# Altium PCB E73N30.PcbDoc
Units mm, origin at the board's own origin, x right, y up, seen from the top; angles counter-clockwise.
Board outline 30 x 91.75 mm, 2 copper layers (Top Layer, Bottom Layer); 36 components, 41 nets, 174 pads, 0 vias.
Unrouted connection lines stored in the file: 108.
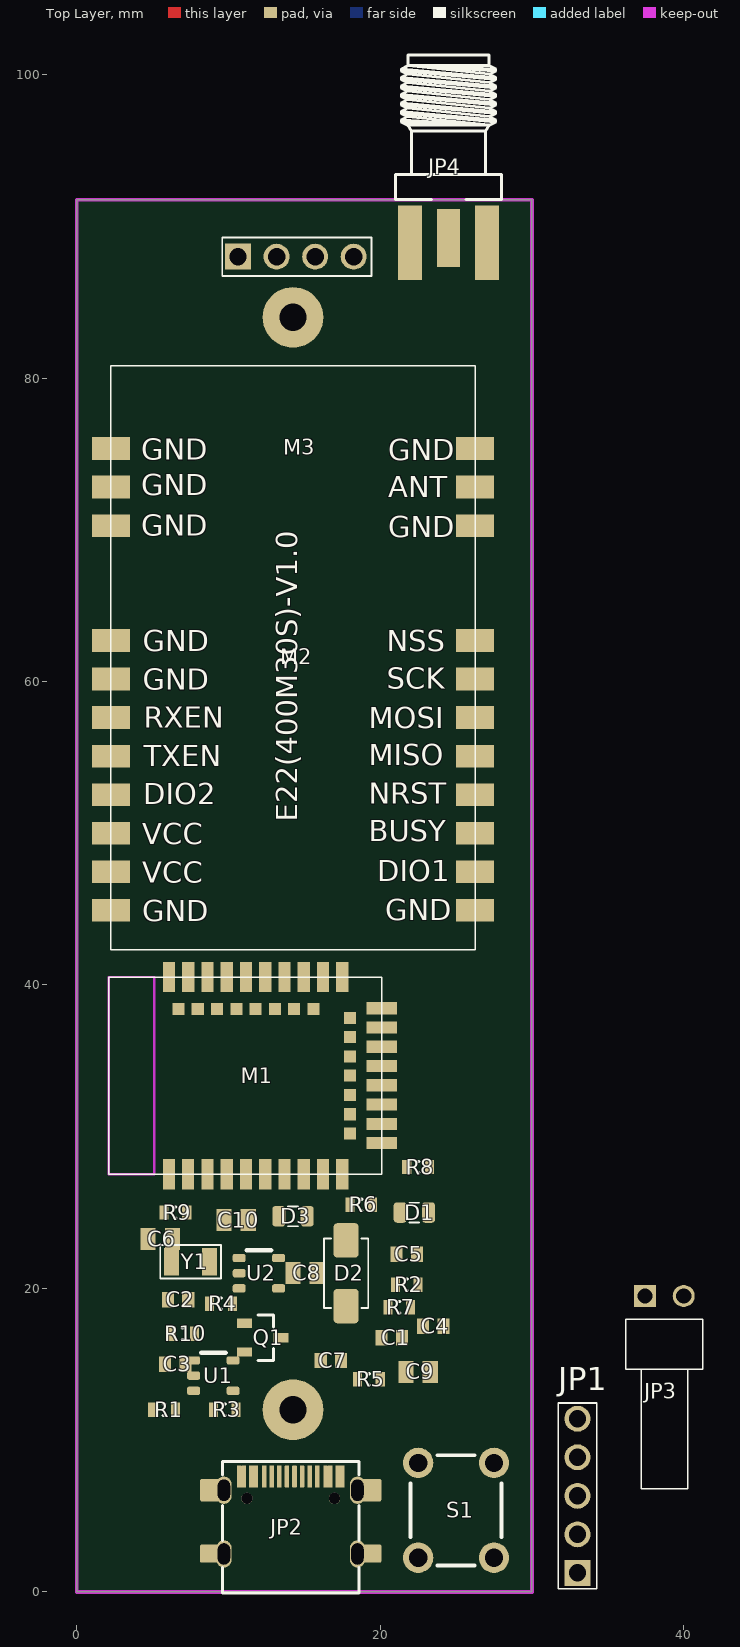
[diagram p0: Top Layer view]
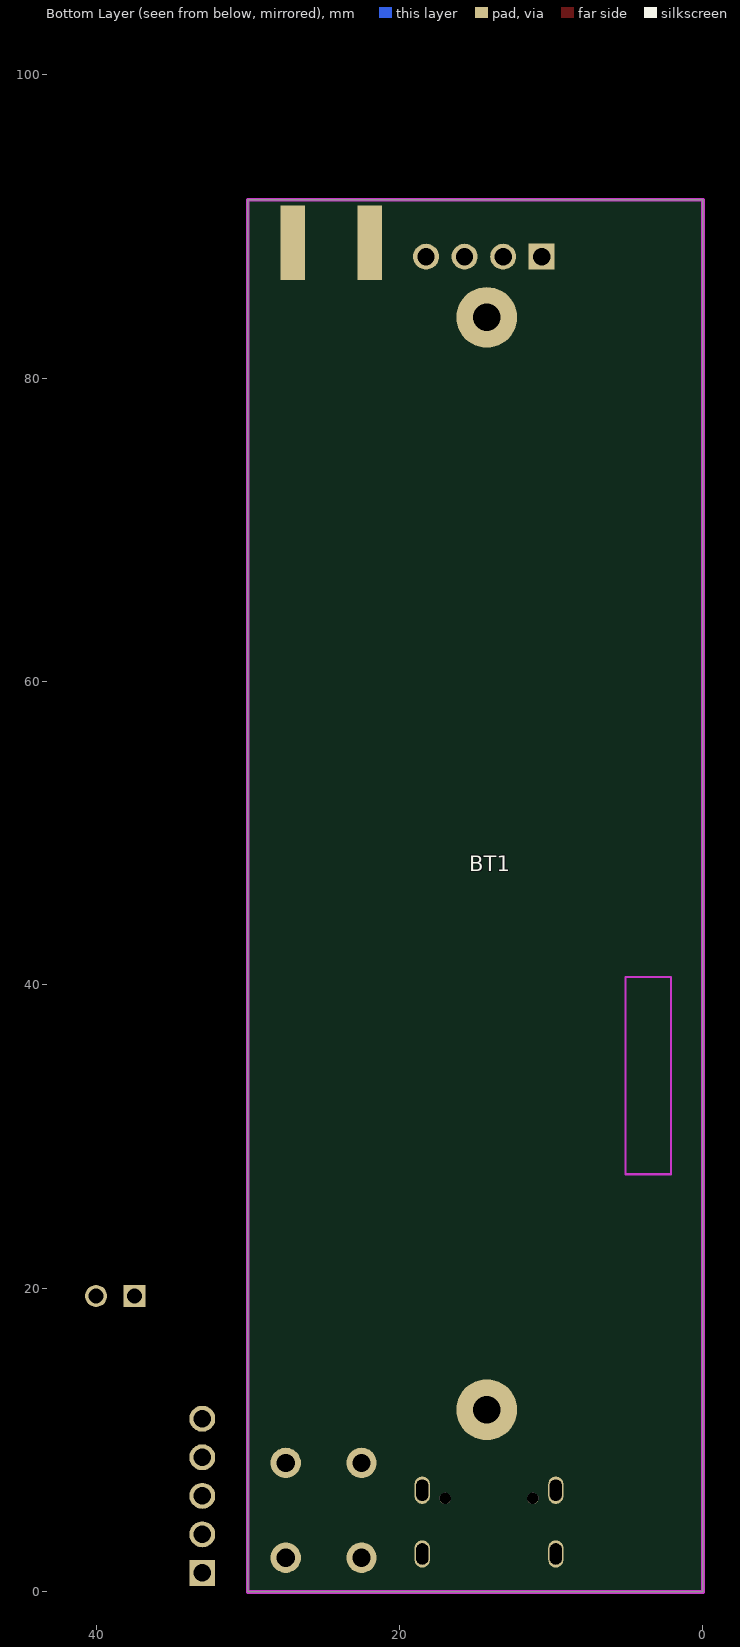
[diagram p1: Bottom Layer view, seen from below]

## Layer stack, top to bottom
Top Solder: solder mask 0.0102, Solder Resist, Dk 3.5
Top Layer: signal copper 0.0356
Dielectric 1: dielectric 0.32, FR-4, Dk 4.8
Bottom Layer: signal copper 0.0356
Bottom Solder: solder mask 0.0102, Solder Resist, Dk 3.5

## Board outline
0,0 0,91.75 30,91.75 30,0

## Design rules (kind name [scope] priority, off if disabled: settings)
Clearance [All] p1: gap=0.254 ignorepadtopadclearanceinfootprint=FALSE
PolygonConnect [All] p1: connectstyle=Relief reliefconductorwidth=0.254 reliefentries=4 polygonreliefangle="90 Angle" airgapwidth=0.254
RoutingVias [All] p1: holewidth=0.711 width=1.27 viastyle="Through Hole" minholewidth=0.711 minwidth=1.27 maxholewidth=0.711 maxwidth=1.27
SolderMaskExpansion [All] p1: expansion=0 istentingtop=FALSE
SupplyNets "Schematic Supply Nets_4" [InNet('VBUS')] p1: voltage=0.000
SupplyNets "Schematic Supply Nets_3" [InNet('V_BATT')] p2: voltage=0.000
SupplyNets "Schematic Supply Nets_2" [InNet('GND')] p3: voltage=0.000
SupplyNets "Schematic Supply Nets_1" [InNet('VIN')] p4: voltage=0.000
SupplyNets "Schematic Supply Nets" [InNet('VCC')] p5: voltage=0.000
Width [All] p1: maxlimit=0.254 minlimit=0.254 preferedwidth=0.254
30 further rules are at their usual default settings.

## Components (designator, comment, footprint, x,y, rotation, side; value= is the part's Value field where it differs from the comment)
BT1 "18650" 18650 14.25,48 r90 bottom
C1 "100nF" C-0603 20.75,16.75 r0 top
C2 "22pF" C-0603 6.675,19.25 r0 top
C3 "22pF" C-0603 6.5,15 r0 top
C4 "CAPN" C-0603 23.5,17.5 r0 top
C5 "CAPN" C-0603 21.75,22.25 r0 top
C6 "10uF" C-0805 5.5,23.25 r0 top
C7 "CAPN" C-0603 16.75,15.25 r0 top
C8 "10uF" C-0805 15.05,21 r0 top
C9 "10uF" C-0805 22.5,14.5 r0 top
C10 "10uF" C-0805 10.5,24.5 r0 top
D1 "DLED" LED0805 22.25,25 r0 top
D2 "SS14" D-SMA 17.75,21 r90 top
D3 "LED_1" LED_0805 14.25,24.75 r0 top
JP1 "HEADER 5" PLS1-5 33,1.25 r90 top
JP2 "L-KLS1-5473" USB_C_SMD_SLOT 14.1,7.6 r0 top
JP3 "CON2" WH-02R 37.46,19.5 r0 top
JP4 "EM-SA071-GGT" SMA_F_EDGE 24.5,90.5 r270 top
M1 "E73-2G4M08S1C" E73-2G4M08S1CX 20.1,40.52 r180 top
M2 "E22-400M30S" PE22(400M30S) 2.25,75.35 r90 top
M3 "OLED0_96" OLED096_I2C 10.63,88 r0 top
Q1 "IRLML6401" SOT-23 12.25,16.75 r0 top
R1 "4k7" R-0603 5.75,12 r0 top
R2 "10k" R-0603 21.75,20.25 r0 top
R3 "4k7" R-0603 9.75,12 r0 top
R4 "4k7" R-0603 9.5,19 r0 top
R5 "1k" R-0603 19.25,14 r0 top
R6 "100k" R-0603 18.75,25.5 r0 top
R7 "100k" R-0603 21.25,18.75 r0 top
R8 "10k" R-0603 22.5,28 r0 top
R9 "10k" R-0603 6.5,25 r0 top
R10 "470" R-0603 7,17 r0 top
S1 "KLS7-TS3602 -3 15-180" KN_MIN 25,5.4 r90 top
U1 "STC4054GR" SOT-23-5 9,14.25 r0 top
U2 "LP5907MFX-3.0" SOT-23-5 12,21 r0 top
Y1 "32.768k" KX-327 7.5,21.75 r0 top

## Footprints (in the part's own frame and the unit in brackets; to place one, negate y for a bottom-side part, rotate by r counter-clockwise, add the part's x,y. Pads: shape width x height; smd on the part's side, far side on the other; paste and mask are expansions set on the pad)
18650 [mm]
  round 4 hole 1.8: 1(-36,0) 2(36,0)
  body extent -37.5,-10.5 37.5,10.5, height 21
C-0603 [mm] "Chip Capacitor, 2-Leads, Body 1,60x0,80mm, IPC Medium Density"
  rect 0.8x1 smd: 1(-0.675,0) 2(0.675,0)
  body extent -0.8,-0.4 0.8,0.4, height 0.8
C-0805 [mm] "Chip Capacitor, 2-Leads, Body 2,00x1,25mm, IPC Medium Density"
  rect 1x1.45 smd: 1(-0.8,0) 2(0.8,0)
  body extent -1,-0.62 1,0.63, height 1.25
D-SMA [mm] "Diode, Molded Body; 4.315 mm L X 2.605 mm W X 2.41 mm H body"
  rrect30% 2.27x1.65 smd: 1(-2.165,0) 2(2.165,0)
  silkscreen extent -2.29,-1.46 2.29,1.46, body extent -2.61,-1.3 2.61,1.3, height 2.41
E73-2G4M08S1CX [mm]
  rect 0.8x2 smd: 1(14.03,13) 2(12.76,13) 3(11.49,13) 4(10.22,13) 5(8.95,13) 6(7.68,13) 7(6.41,13) 8(5.14,13) 9(3.873,13) 10(2.6,13) 26(2.6,0) 27(3.87,0) 29(5.14,0) 31(6.41,0) 33(7.68,0) 35(8.95,0) 37(10.22,0) 39(11.49,0) 41(12.757,0) 43(14.03,0)
  rect 2x0.8 smd: 11(0,10.945) 13(0,9.675) 15(0,8.405) 17(0,7.135) 19(0,5.865) 21(0,4.595) 23(0,3.325) 25(0,2.055)
  rect 0.8x0.8 smd: 12(2.1,10.31) 14(2.1,9.04) 16(2.1,7.77) 18(2.1,6.5) 20(2.1,5.23) 22(2.1,3.96) 24(2.1,2.69) 28(4.505,2.1) 30(5.775,2.1) 32(7.045,2.1) 34(8.315,2.1) 36(9.585,2.1) 38(10.855,2.1) 40(12.125,2.1) 42(13.395,2.1)
  Keep-Out Layer lines w0.15: 18,13 18,0 15,0 15,13 18,13
  silkscreen extent 0,0 18,13, body extent 0,0 18.29,13, height 3
KN_MIN [mm]
  round 2 hole 1.2 mask+0.05: 1(-3.15,-2.5) 1(3.1,-2.5) 2(-3.15,2.5) 2(3.1,2.5)
  silkscreen extent -3.66,-3 3.6,3, body extent -3.95,-3.1 3.95,3.1, height 7.01
KX-327 [mm]
  rect 1x1.8 smd: 1(-1.25,0) 2(1.25,0)
  silkscreen extent -2,-1.1 2,1.1, body extent -1.6,-0.75 1.6,0.75, height 0.71
LED0805 [mm] "LED, Chip; 2.00 mm L X 1.25 mm W X 0.80 mm H body"
  rrect51% 0.86x1.35 smd: 1(-0.935,0) 2(0.935,0)
  silkscreen extent -0.33,-0.65 0.33,0.65, body extent -1,-0.63 1,0.63, height 0.25
LED_0805 [mm] "LED, Chip; 2.00 mm L X 1.25 mm W X 0.80 mm H body"
  rrect51% 0.86x1.35 smd: A(0.935,0) K(-0.935,0)
  silkscreen extent -0.33,-0.65 0.33,0.65, body extent -1,-0.63 1,0.63, height 0.25
OLED096_I2C [mm] "Header, Vertical, 2.54 mm pitch; 0.70 mm lead width, 7 pins, 1 row, 7 pins per row, 16.51 mm L X 2.54 mm W X 7.54 mm H body"
  rect 1.71x1.71 hole 1.14 paste-2539.97: 1(0,0)
  round 1.71 hole 1.14 paste-2539.97: 2(2.54,0) 3(5.08,0) 4(7.62,0)
  silkscreen extent -1.04,-1.27 8.8,1.27, body extent -10.19,-26.7 17.81,1.3, height 7.08
PE22(400M30S) [mm] "38.5mm*24mm*3.8mm-S"
  rect 1.5x2.5 smd: 1(0,0) 2(-2.54,0) 3(-5.08,0) 4(-12.65,0) 5(-15.19,0) 6(-17.73,0) 7(-20.27,0) 8(-22.81,0) 9(-25.35,0) 10(-27.89,0) 11(-30.43,0) 12(-30.43,-24) 13(-27.89,-24) 14(-25.35,-24) 15(-22.81,-24) 16(-20.27,-24) 17(-17.73,-24) 18(-15.19,-24) 19(-12.65,-24) 20(-5.08,-24) 21(-2.54,-24) 22(0,-24)
  silkscreen extent -33.04,-24 5.46,0, body extent -32.81,-24.01 5.69,0.01, height 3.87
PLS1-5 [mm] "Header, Vertical, 2.54 mm pitch; 0.70 mm lead width, 5 pins, 1 row, 5 pins per row, 11.43 mm L X 2.54 mm W X 7.54 mm H body"
  rect 1.71x1.71 hole 1.14 paste-2539.97: 1(0,0)
  round 1.71 hole 1.14 paste-2539.97: 2(2.54,0) 3(5.08,0) 4(7.62,0) 5(10.16,0)
  silkscreen extent -1.04,-1.27 11.2,1.27, body extent -0.64,-1.27 10.8,1.27, height 7.54
R-0603 [mm] "Chip Resistor, 2-Leads, Body 1,60x0,82mm, IPC Medium Density"
  rect 0.6x0.95 smd: 1(-0.75,0) 2(0.75,0)
  silkscreen extent -0.05,-0.38 0.05,0.38, body extent -0.8,-0.4 0.8,0.4, height 0.45
SMA_F_EDGE [mm] "SMA End Launch Jack for 1.58mm PCB, 50 Ohm, Flat Tab Contact"
  rect 3.81x1.5 smd: 1(1.27,0)
  rect 4.9x1.6 smd: 2(1.575,2.54) 2(1.575,-2.54)
  rect 4.9x1.6 smd far side: 2(1.575,2.54) 2(1.575,-2.54)
  silkscreen extent -10.81,-3.5 -1.28,3.5, body extent -10.73,-3.25 2.77,3.25, height 3.7
SOT-23 [mm]
  rect 1x0.6 smd: 1(-1.2,0.95) 2(-1.2,-0.95) 3(1.2,0)
  silkscreen extent -0.3,-1.5 0.7,1.5, body extent -1.25,-1.5 1.25,1.5, height 1.2
SOT-23-5 [mm]
  rrect50% 0.85x0.55 smd mask+0.06: 1(-1.3,1) 2(-1.3,0) 3(-1.3,-1) 4(1.3,-1) 5(1.3,1)
  silkscreen extent -0.8,1.5 0.8,1.5, body extent -1.4,-1.45 1.4,1.45, height 1.45
USB_C_SMD_SLOT [mm] "USB 3.1 Type C"
  rrect20% 1.8x1.2 smd mask+0.07: 1(-5.08,-5.08) 1(5.08,-5.08)
  rrect20% 1.8x1.5 smd mask+0.07: 1(-5.08,-0.9) 1(5.08,-0.9)
  oval 1x1.8 hole 0.8 slot 1.4 at 90 deg: 1(-4.4,-5.1) 1(-4.4,-0.9) 1(4.4,-5.1) 1(4.4,-0.9)
  rrect30% 0.3x1.45 smd paste-2 mask+0.07: A1(-3.1,0) A4(-2.6,0) A9(2.6,0) A12(3.4,0) B1(3.1,0) B4(2.3,0) B9(-2.3,0) B12(-3.4,0)
  rrect30% 0.3x1.45 smd mask+0.07: A5(-1.25,0) A6(-0.25,0) A7(0.25,0) A8(1.25,0) B5(1.75,0) B6(0.75,0) B7(-0.75,0) B8(-1.75,0)
  round 0.75 hole 0.75 unplated paste-2539.97 mask+0.07: MH(-2.885,-1.44) MH(2.885,-1.44)
  silkscreen extent -4.5,-7.69 4.5,1, body extent -4.47,-7.7 4.47,0.2, height 3.2
WH-02R [mm]
  rect 1.45x1.45 hole 1: 1(0,0)
  round 1.45 hole 1: 2(2.54,0)
  silkscreen extent -1.27,-12.7 3.81,-1.52, body extent -1.3,-13.3 3.8,0.27, height 5.9

## Part data
BT1: library part Battery, "Multicell Battery", LatestRevisionDate=17-Jul-2002, LatestRevisionNote="Re-released for DXP Platform.", PackageDescription="Battery; 2 Leads", PackageReference=BAT-2, Published=24-Mar-1999, Publisher="Altium Limited"
C1 C2 C3 C6 C8 C9 C10: library part CAPN, Voltage=50V, Вид=Конденсатор, Точність/група=NP0
C4 C5 C7: Voltage=50V, Вид=Конденсатор, Точність/група=NP0
D2: library part DIODSH, Вид=Діод
JP4: library part SMA, "SMA Female R/A PCB Mount", Вид=Роз'єм
M2: library part E22
M3: library part OLED0_96_I2C
Q1: library part MOSF-P, Вид=Транзистор
R1 R2 R3 R4 R5 R6 R7 R8 R9 R10: library part RES, Вид=Резистор, Точність/група=5%
S1: library part SW-1, Вид=Кнопка
U1: library part STC4054
U2: library part LP5907, "250mA Low-Dropout Regulator", Вид=Мікросхема
Y1: library part Y, Вид=Кварц, Точність/група=20ppm
D1 D3: Вид=Світлодіод
JP1 JP3: Вид=Роз'єм
JP2: Mounting  Method=SMD

## Nets (pads, with @x,y where several pads share a name; then routed paths per layer and width w, separated by ;. In a path a pad name is that pad's centre, name@x,y a point inside that pad or via, vN(x,y) a via of type N, cw(c..) or ccw(c..) an arc to the next point about the centre after c; other vN are vias at no path point)
ANT_SW: M1.30 M2.6
BATT_LEVEL: C7.1 M1.9 R7.1 R8.2
BUSY: M1.8 M2.14
DN: JP2.A7 JP2.B7 M1.29
DP: JP2.A6 JP2.B6 M1.31
ENC_A: M1.42
ENC_B: M1.40
ENC_PUSH: M1.38
GND: BT1.2 C1.1 C2.1 C3.1 C4.2 C5.2 C6.2 C7.2 C8.2 C9.2 C10.2 D3.K JP1.5 JP2.A1 JP2.A12 JP2.B1 JP2.B12 JP3.2 JP4.2 M1.5 M1.21 M1.24 M2.1 M2.2 M2.3 M2.4 M2.5 M2.11 M2.12 M2.20 M2.22 M3.1 R1.1 R3.1 R4.1 R6.1 R8.1 S1.1 U1.2 U2.2
GPS_EN: M1.35
GPS_RX: M1.34
GPS_TX: M1.32
KEY: M1.36 R9.2 S1.2
LED: M1.28 R10.2
MISO: M1.7 M2.16
MOSI: M1.2 M2.17
NetC2_2: C2.2 M1.11 Y1.2
NetC3_2: C3.2 M1.13 Y1.1
NetD1_2: D1.2 R5.2
NetD3_A: D3.A R10.1
NetJP2_A5: JP2.A5 R3.2
NetJP2_B5: JP2.B5 R1.2
NetJP4_1: JP4.1 M2.21
NetM2_7: M2.7 M2.8
NetR4_2: R4.2 U1.5
NetR5_1: R5.1 U1.1
NRST: C1.2 JP1.2 M1.26 R2.1
NSS: M1.6 M2.19
RF_IRQ: M1.43 M2.13
RF_RST: M1.41 M2.15
RXD2: M1.14
SCK: M1.1 M2.18
SCL: M1.3 M3.3
SDA: M1.18 M3.4
SWCLK: JP1.3 M1.39
SWDIO: JP1.4 M1.37
TXD2: M1.16
V_BATT: BT1.1 C6.1 JP3.1 Q1.3 R7.2 U1.3
VBUS: C5.1 D1.1 D2.1 JP2.A4 JP2.A9 JP2.B4 JP2.B9 M1.27 Q1.1 R6.2 U1.4
VCC: C4.1 C10.1 JP1.1 M1.19 M1.23 M3.2 R2.2 R9.1 U2.5
VIN: C8.1 C9.1 D2.2 M2.9 M2.10 Q1.2 U2.1 U2.3
pads on no net: JP2.1 JP2.A8 JP2.B8 JP2.MH M1.4 M1.10 M1.12 M1.15 M1.17 M1.20 M1.22 M1.25 M1.33 U2.4

## Keep-outs
Keep-Out Layer:
  the board outline again, w0.254

## Text inside footprints (layer, text, board x,y; h text height)
M2: Top Overlay "E22(400M30S)-V1.0" at 14.528,50.751 h1.4 r90; Top Overlay "GND" at 4.346,61.984 h1.4; Top Overlay "GND" at 4.346,59.451 h1.4; Top Overlay "RXEN" at 4.419,56.948 h1.4; Top Overlay "TXEN" at 4.419,54.415 h1.4; Top Overlay "DIO2" at 4.367,51.912 h1.4; Top Overlay "VCC" at 4.301,49.274 h1.4; Top Overlay "VCC" at 4.301,46.74 h1.4; Top Overlay "GND" at 4.301,44.207 h1.4; Top Overlay "GND" at 4.241,69.607 h1.4; Top Overlay "GND" at 4.241,72.28 h1.4; Top Overlay "GND" at 4.241,74.602 h1.4; Top Overlay "GND" at 20.541,74.575 h1.4; Top Overlay "ANT" at 20.541,72.148 h1.4; Top Overlay "GND" at 20.541,69.506 h1.4; Top Overlay "GND" at 20.314,44.271 h1.4; Top Overlay "DIO1" at 19.802,46.818 h1.4; Top Overlay "BUSY" at 19.229,49.479 h1.4; Top Overlay "NRST" at 19.229,51.944 h1.4; Top Overlay "MISO" at 19.229,54.469 h1.4; Top Overlay "MOSI" at 19.229,56.934 h1.4; Top Overlay "SCK" at 20.42,59.534 h1.4; Top Overlay "NSS" at 20.42,61.999 h1.4